# Altium PCB back_STM32F405.PcbDoc (part 2 of 2)
Units mil, origin at the board's own origin, x right, y up, seen from the top; angles counter-clockwise.
Board outline 3149.61 x 3937.01 mil, 4 copper layers (Top Layer, GND02, PWR03, Bottom Layer), stack 23.756 mil thick; 194 components, 149 nets, 1258 pads, 42 vias.
Unrouted connection lines stored in the file: 522.
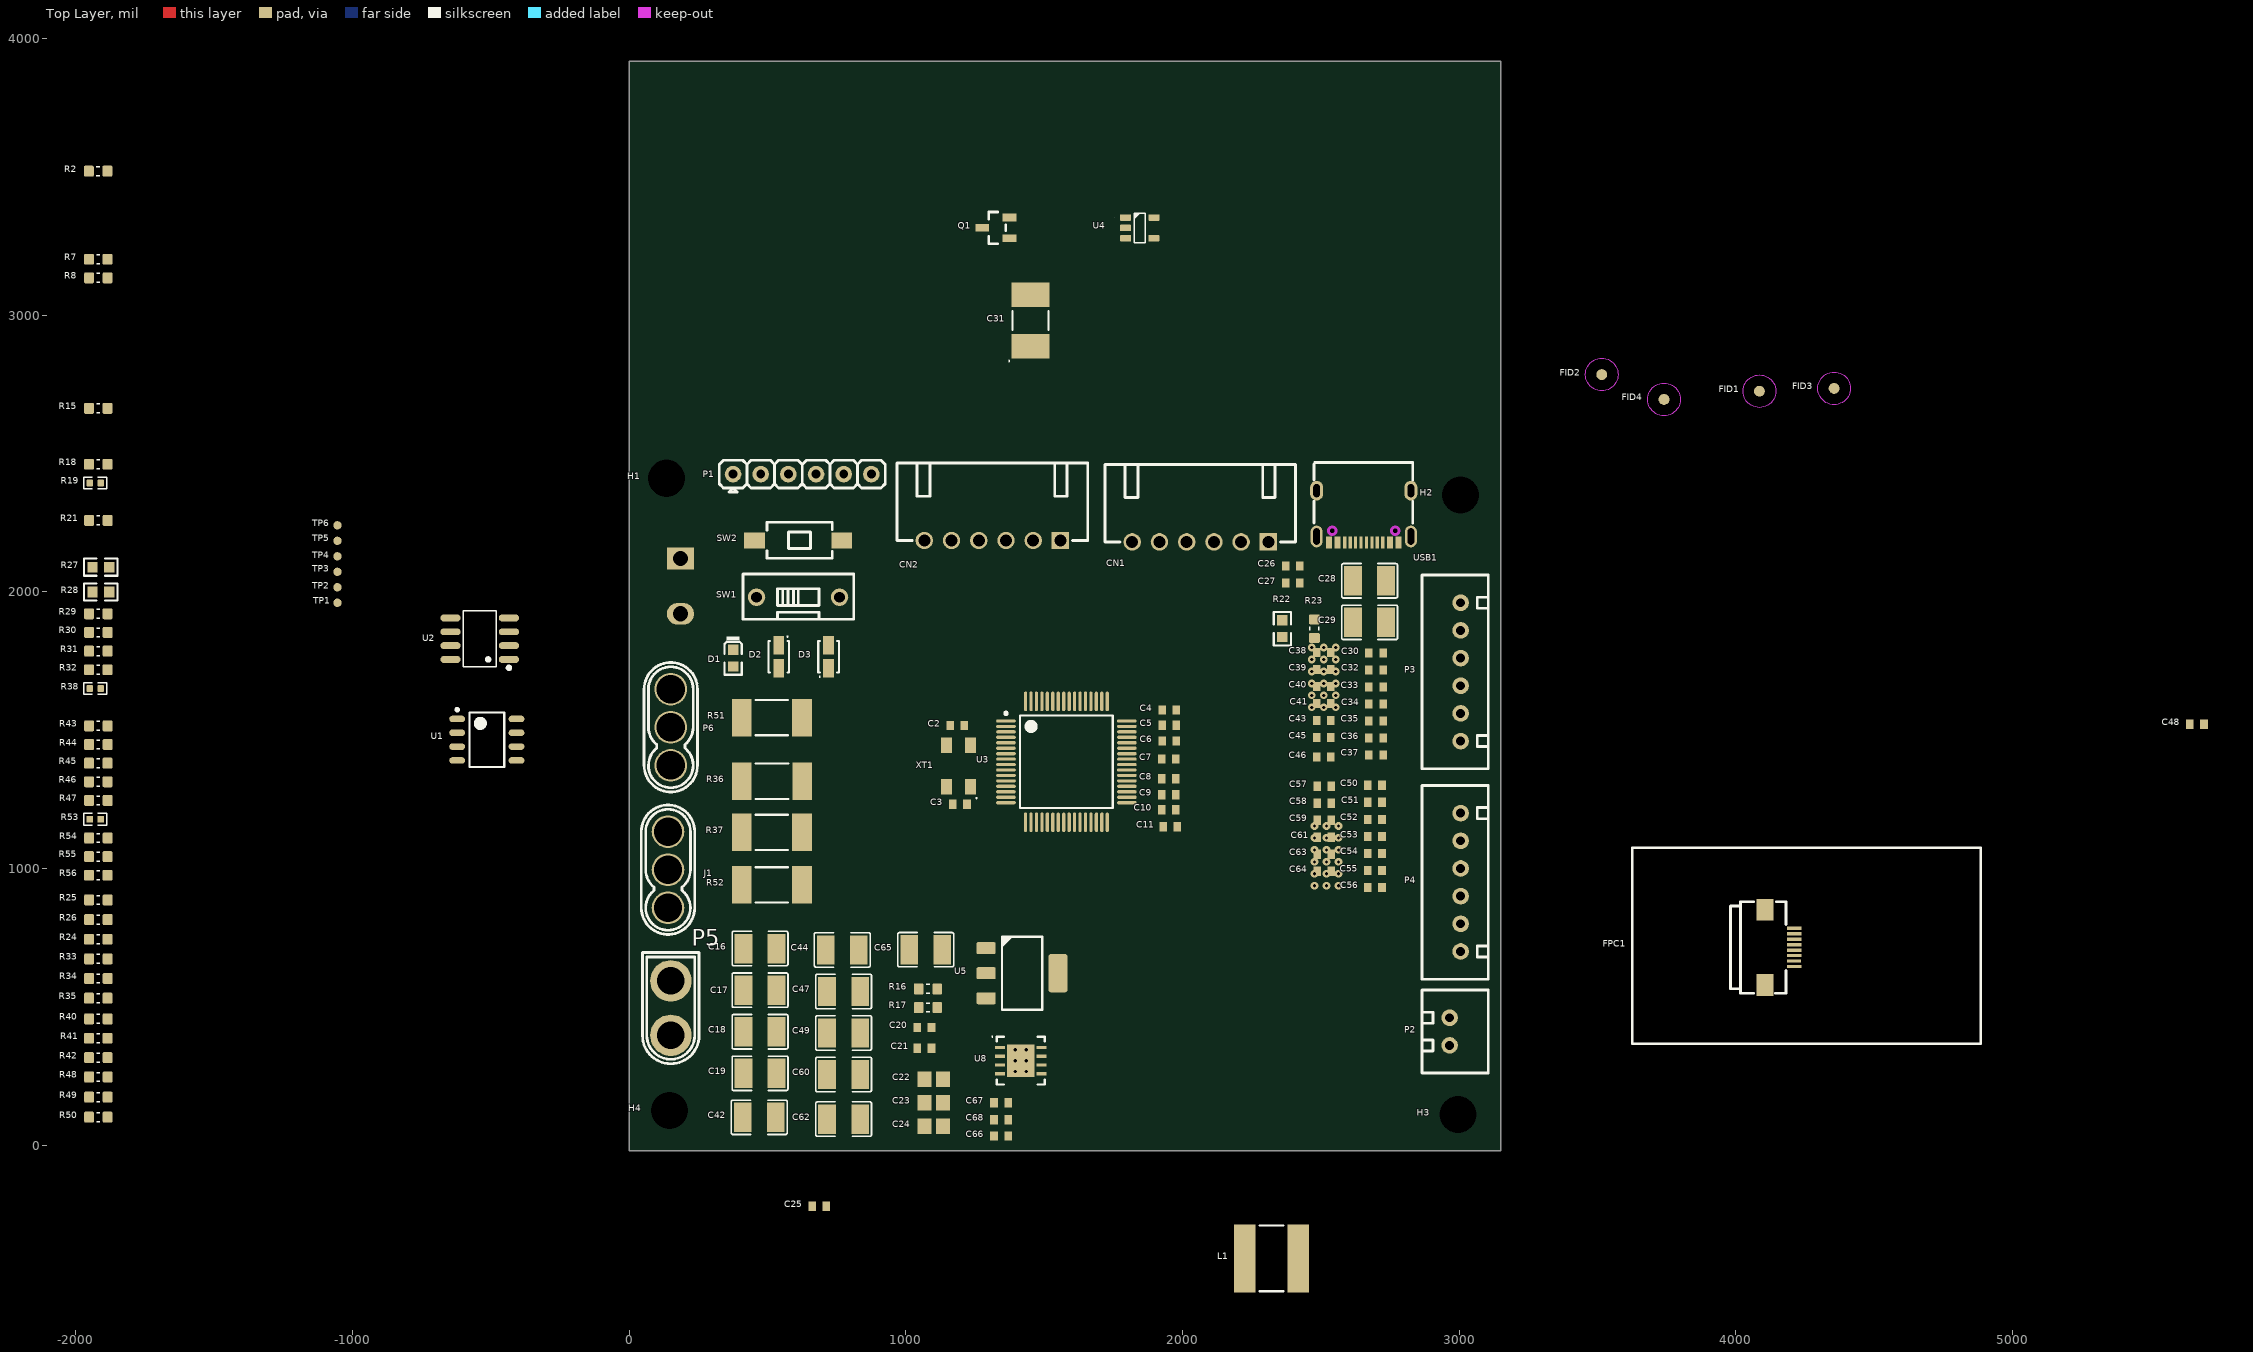
[diagram p0: Top Layer view]

## Part data (continued)
U3: "ARM Cortex-M4 32-bit MCU+FPU, 210 DMIPS, 1024 kB Flash, 192 kB Internal RAM, 51 I/Os, 64-pin LQFP, -40 to 85 degC, Tray", I/Os (High Current)=51, Manufacturer=STMicroelectronics, Operating Frequency(F) (Processor speed) (MHz)=168, Supplier Part Number 1=497-11767-ND, Supply Voltage(Vcc) max (V)=3.6, Supply Voltage(Vcc) min (V)=1.8, ComponentLink1Description="Manufacturer URL", ComponentLink1URL=http://www.st.com/web/en/home.html, ComponentLink2Description=Datasheet, ComponentLink2URL=http://www.st.com/st-web-ui/static/active/en/resource/technical/document/datasheet/DM00037051.pdf, ComponentLink3Description="Package Specification", ComponentLink3URL=http://www.st.com/st-web-ui/static/active/en/resource/technical/document/datasheet/DM00037051.pdf, Core="ARM Cortex-M4", D/A Converter=2x12-bit, DatasheetVersion="Rev. 4", FLASH Size (Prog) (kB)=1024, Internal RAM Size (kB)=192, Mounting Technology="Surface Mount", PackageDescription="64-Pin Low Profile Quad Flat Package, 10 x 10 mm Body, 0.5 mm Pitch", PackageReference=LQFP64, PackageVersion="Rev. 4, 06/2013", Packing=Tray, PartNumber=STM32F405RGT6, Supplier 1=Digi-Key, Supplier 2=Farnell, Supplier 3=Newark, Supplier 4=Mouser, Supplier Part Number 2=2064363, Supplier Part Number 3=73T2329, Supplier Part Number 4=511-STM32F405RGT6
U4: library part LP5907MFX-3.3/NOPB, "IC REG LDO 3.3V 0.25A SOT23-5", Current - Limit (Min)=-, Current - Output=250mA, Manufacturer="Texas Instruments", Operating Temperature="-40°C ~ 125°C", Package / Case="SC-74A, SOT-753", Supplier Device Package=SOT-23, Supplier Part Number 1=296-38557-1-ND, Voltage - Input="Up to 5.5V", Category="Integrated Circuits (ICs)", ComponentLink1Description=http://www.ti.com/lit/ds/symlink/lp5907.pdf, ComponentLink1URL=http://www.ti.com/lit/ds/symlink/lp5907.pdf, Mounting Type="Surface Mount", Packaging="Cut Tape (CT)", Part Status=Active, Pricing 1="1=0.57, 10=0.487, 100=0.3634, 500=0.28552, 1000=0.22063 (USD)", Regulator Topology="Positive Fixed", RoHS="RoHS Compliant", Stock 1=39845, Supplier 1=Digi-Key, Voltage - Dropout (Typical)=-, Voltage - Output=3.3V
U5: library part AZ1117EH-3.3TRG1, "IC REG LDO 3.3V 1A SOT223", Current - Limit (Min)=-, Current - Output=1A, Manufacturer="Diodes Incorporated", Operating Temperature="-40°C ~ 125°C", Package / Case="TO-261-4, TO-261AA", Supplier Device Package=SOT-223, Supplier Part Number 1=AZ1117EH-3.3TRG1DICT-ND, Voltage - Dropout (Typical)="1.1V @ 1A", Voltage - Input="Up to 13V", Category="Integrated Circuits (ICs)", ComponentLink1Description=http://www.diodes.com/assets/Datasheets/AZ1117E.pdf, ComponentLink1URL=http://www.diodes.com/assets/Datasheets/AZ1117E.pdf, Mounting Type="Surface Mount", Packaging="Cut Tape (CT)", Part Status=Active, Pricing 1="1=0.43, 10=0.321, 100=0.1815, 500=0.12022, 1000=0.09216 (USD)", Regulator Topology="Positive Fixed", RoHS="RoHS Compliant", Stock 1=22748, Supplier 1=Digi-Key, Voltage - Output=3.3V
U6 U7: "MOTOR DRIVER, 3PH, 56HTSSOP"
U8: "DRIVER, MOSFET, HALF BRIDGE, WSON-8, 1A", Supplier Part Number 1=2400642RL, Supplier 1=Farnell, Supplier 2=Farnell, Supplier 3=Farnell, Supplier Part Number 2=2400642, Supplier Part Number 3=2382850
U9: library part To-220-35W-3R-1%, "220封装2插电阻", JLCPCB Part Class="Extended Part", LCSC Part Name="3Ω ±1% 35W", Manufacturer=Milliohm(毫欧), Operating Temperature Range=-55℃~+150℃, Overload Voltage (Max)=350V, Power(Watts)=35W, Tolerance=±1%, Add into BOM=yes, Convert to PCB=yes, Datasheet=https://atta.szlcsc.com/upload/public/pdf/source/20221020/51BE5AE648F6C576EF2EAAB1AEBF3830.pdf, Device=To-220-35W-3R-1%, Manufacturer Part=To-220-35W-3R-1%, Name=3Ω, Supplier=LCSC, Supplier Footprint=TO-220-2, Supplier Part=C5209756, Symbol=TO-220-35W-3R-1%
USB1: Current Rating - Power (Max)=5A, JLCPCB Part Class="Extended Part", LCSC Part Name="Type-C 母 卧贴", Manufacturer="SHOU HAN(首韩)", Operating Temperature Range=-25℃~+85℃, Add into BOM=yes, Connector Type=Type-C, Convert to PCB=yes, Datasheet=https://atta.szlcsc.com/upload/public/pdf/source/20211123/39B17C16241EAC15C5E277BDA434118E.pdf, Device="TYPE-C 16PIN 2MD(073)", Gender=母, Manufacturer Part="TYPE-C 16PIN 2MD(073)", Mounting Style=卧贴, Name="TYPE-C 16PIN 2MD(073)", Number of Contacts=16P, Number of Ports=1, Standard=-, Supplier=LCSC, Supplier Footprint=SMD, Supplier Part=C2765186, Symbol="TYPE-C 16PIN 2MD(073)"
XT1: library part ABM3B-8.000MHZ-10-1-U-T, "Crystal 8MHz ±10ppm 10pF 200 Ohm -10°C ~ 60°C Surface Mount 4-SMD, No Lead (DFN, LCC)", Frequency Stability=±10ppm, Load Capacitance=10pF, Manufacturer="Abracon LLC", Operating Mode=Fundamental, Operating Temperature="-10°C ~ 60°C", Package / Case="4-SMD, No Lead", Ratings=-, Supplier Part Number 1=535-9721-1-ND, Category="Crystals, Oscillators, Resonators", ComponentLink1Description=http://www.abracon.com/Resonators/abm3b.pdf, ComponentLink1URL=http://www.abracon.com/Resonators/abm3b.pdf, Frequency Tolerance=±10ppm, Height - Seated (Max)="0.043\" (1.10mm)", Manufacturer Part Number=ABM3B-8.000MHZ-10-1-U-T, Mounting Type="Surface Mount", Packaging="Cut Tape (CT)", Part Status=Active, Pricing 1="1=0.69, 10=0.578, 50=0.5198, 100=0.462, 500=0.4389 (USD)", Pricing 2="1000=0.336, 3000=0.315, 5000=0.3045, 10000=0.294 (USD)", RoHS="RoHS Compliant", Size / Dimension="0.197\" L x 0.126\" W (5.00mm x 3.20mm)", Stock=35437, Supplier 1=Digi-Key, Supplier 2=Digi-Key, Supplier Part Number 2=535-9721-2-ND, Type="MHz Crystal"

## Via types
v1: diameter 27.56, hole 11.81, Top Layer to Bottom Layer, 42 vias

## Nets (pads, with @x,y where several pads share a name; then routed paths per layer and width w, separated by ;. In a path a pad name is that pad's centre, name@x,y a point inside that pad or via, vN(x,y) a via of type N, cw(c..) or ccw(c..) an arc to the next point about the centre after c; other vN are vias at no path point)
+5: C21.2 C31.1 L1.2 P1.1 P3.2 P4.2 R22.2 U4.1 U4.3 U5.3
AGND: C1.1 C2.2 C3.2 C4.1 C5.1 C6.1 C7.1 C8.1 C9.1 C10.1 C11.1 C12.2 C13.2 C14.2 C15.2 C16.2 C17.1 C18.1 C19.1 C20.1 C21.1 C22.1 C23.1 C24.1 C25.1 C26.2 C27.2 C28.1 C29.1 C31.2 C34.1 C35.1 C38.1 C39.2 C40.2 C41.1 C42.1 C43.1 C44.1 C45.1 C46.1 C47.1 C48.1 C49.1 C52.1 C53.1 C56.1 C57.2 C58.2 C59.1 C60.1 C61.1 C62.1 C63.1 C64.1 C65.1 C66.1 C68.1 CN1.6 CN2.6 D2.A FPC1.2 FPC1.9 FPC1.10 P1.4 P3.6 P4.6 P5.2 Q12.S Q13.S Q24.S Q25.S Q28.S Q29.S R7.1 R17.1 R18.1 R20.1 R21.2 R27.1 R28.2 R36.1 R37.1 R39.1 R43.2 R44.1 R51.1 R52.1 R55.1 SW1.2 SW2.2 TP2.1 U1.2 U2.3 U3.12 U3.18 U3.63 U4.2 U5.1 U6.28 U6.30 U6.32 U6.44 U6.57 U7.28 U7.30 U7.32 U7.44 U7.55 U7.57 U8.4 U8.9 U9.1 USB1.1 USB1.12 USB1.13 USB1.14 XT1.G
  other v1: 1395.31,265.63 1434.68,265.63 1395.31,305 1434.68,305 1395.31,344.37 1434.68,344.37 2476.69,936.73 2520,936.73 2563.31,936.73 2476.69,980.04 2520,980.04 2563.31,980.04 2476.69,1023.35 2520,1023.35 2563.31,1023.35 2476.69,1066.65 2520,1066.65 2563.31,1066.65 2476.69,1109.96 2520,1109.96 2563.31,1109.96 2476.69,1153.27 2520,1153.27 2563.31,1153.27 2466.69,1581.73 2510,1581.73 2553.31,1581.73 2466.69,1625.04 2510,1625.04 2553.31,1625.04 2466.69,1668.35 2510,1668.35 2553.31,1668.35 2466.69,1711.65 2510,1711.65 2553.31,1711.65 2466.69,1754.96 2510,1754.96 2553.31,1754.96 2466.69,1798.27 2510,1798.27 2553.31,1798.27
AUX_H_1: U3.30 U8.2
AUX_L_1: U3.29 U8.3
AUX_TEMP_1: C66.2 R53.1 R55.2 U3.21
AVCC: C24.2 R19.2 R38.2 R53.2 TP1.1 U4.4 U4.5 U6.24 U7.24
BOOT0_1: R15.1 SW1.1 U3.60
CAN_D_1: U1.1 U3.62
CAN_R_1: U1.4 U3.61
DCBUS: C12.1 C13.1 C14.1 C15.1 C16.1 C17.2 C18.2 C19.2 C28.2 C29.2 C42.2 C44.2 C47.2 C49.2 C60.2 C62.2 C65.2 P5.1 Q2.D Q3.D Q4.D Q5.D Q6.D Q7.D Q14.D Q15.D Q16.D Q17.D Q18.D Q19.D Q26.D Q27.D R16.2 U6.29 U6.53 U6.54 U7.29
EN_GATE_1: U3.33 U6.16 U7.16
FAULT_1: U3.54 U6.6 U7.6
GH_A_2: R24.2 U6.47
GH_A_3: R40.2 U7.47
GH_B_2: R25.2 U6.42
GH_B_3: R41.2 U7.42
GH_C_2: R26.2 U6.37
GH_C_3: R42.2 U7.37
GL_A_2: R35.2 U6.45
GL_A_3: R50.2 U7.45
GL_B_2: R34.2 U6.40
GL_B_3: R49.2 U7.40
GL_C_2: R33.2 U6.35
GL_C_3: R48.2 U7.35
GPIO0_1: SW2.1 U3.28
GVDD: C34.2 C35.2 C52.2 C53.2 U6.13 U7.13
LEDA_1: FPC1.1 R8.1
M0_AH_1: U3.41 U6.17
M0_AL_1: U3.34 U6.18
M0_BH_1: U3.42 U6.19
M0_BL_1: U3.35 U6.20
M0_CH_1: U3.43 U6.21
M0_CL_1: U3.36 U6.22
M0_ENC_A_1: P4.3 R9.1 U3.56
M0_ENC_B_1: P4.4 R10.1 U3.57
M0_ENC_Z_1: P4.5 R11.1 U3.40
M0_nCS_1: U3.2 U6.8
M0_SO1_1: C45.2 R31.2 TP3.1 U3.8
M0_SO2_1: C46.2 R32.2 TP4.1 U3.9
M0_TEMP_1: C25.2 C48.2 R19.1 R20.2 R38.1 R39.2
M0_TEMP（ENC_CS0）_1: CN1.5 U3.25
M1_AH_1: U3.37 U7.17
M1_AL_1: U3.23 U7.18
M1_BH_1: U3.38 U7.19
M1_BL_1: U3.26 U7.20
M1_CH_1: U3.39 U7.21
M1_CL_1: U3.27 U7.22
M1_ENC_A_1: P3.3 R12.1 U3.58
M1_ENC_B_1: P3.4 R13.1 U3.59
M1_ENC_Z_1: P3.5 R14.1 U3.4
M1_nCS_1: U3.3 U7.8
M1_SO1_1: C63.2 R46.2 TP5.1 U3.11
M1_SO2_1: C64.2 R47.2 TP6.1 U3.10
M1_TEMP（ENC_CS1）_1: CN2.5 U3.20
NetC1_2: C1.2 U2.8
NetC2_1: C2.1 U3.5 XT1.3
NetC3_1: C3.1 U3.6 XT1.1
NetC4_2: C4.2 U3.47
NetC5_2: C5.2 U3.31
NetC11_2: C11.2 U3.13
NetC26_1: C26.1 R23.1
NetC27_1: C27.1 R23.2 U6.2
NetC30_1: C30.1 D2.K L1.1 U6.50 U6.51
NetC30_2: C30.2 U6.52
NetC32_2: C32.2 U6.48
NetC33_2: C33.2 U6.43
NetC36_1: C36.1 U6.14
NetC36_2: C36.2 U6.15
NetC37_2: C37.2 U6.38
NetC38_2: C38.2 R29.2 U6.33
NetC39_1: C39.1 C40.1 U6.23
NetC41_2: C41.2 R30.2 U6.31
NetC43_2: C43.2 U6.27
NetC50_2: C50.2 U7.48
NetC51_2: C51.2 U7.43
NetC54_1: C54.1 U7.14
NetC54_2: C54.2 U7.15
NetC55_2: C55.2 U7.38
NetC56_2: C56.2 R44.2 U7.33
NetC57_1: C57.1 C58.1 U7.23
NetC59_2: C59.2 R45.2 U7.31
NetC61_2: C61.2 U7.27
NetC67_1: C67.1 Q26.S Q27.S Q28.D Q29.D U8.6 U9.2
NetC67_2: C67.2 D3.K U8.8
NetD1_K: D1.K R18.2
NetP1_3: P1.3 R1.1
NetP1_5: P1.5 R5.1
NetP2_1: P2.1 R4.2 U1.7
NetP2_2: P2.2 R4.1 U1.6
NetQ1_1: Q1.1 R2.1 R7.2
NetQ1_3: Q1.3 R8.2
NetQ2_G: Q2.G Q3.G R24.1
NetQ4_G: Q4.G Q5.G R25.1
NetQ6_G: Q6.G Q7.G R26.1
NetQ8_G: Q8.G Q9.G R33.1
NetQ10_G: Q10.G Q11.G R34.1
NetQ12_G: Q12.G Q13.G R35.1
NetQ14_G: Q14.G Q15.G R40.1
NetQ16_G: Q16.G Q17.G R41.1
NetQ18_G: Q18.G Q19.G R42.1
NetQ20_G: Q20.G Q21.G R48.1
NetQ22_G: Q22.G Q23.G R49.1
NetQ24_G: Q24.G Q25.G R50.1
NetQ26_G: Q26.G Q27.G R54.1
NetQ28_G: Q28.G Q29.G R56.1
NetR3_1: R3.1 USB1.5
NetR6_1: R6.1 USB1.8
NetR21_1: R21.1 U6.1
NetR22_1: R22.1 R27.2 U6.3
NetR28_1: R28.1 U6.7
NetR31_1: R31.1 U6.25
NetR32_1: R32.1 U6.26
NetR43_1: R43.1 U7.7
NetR46_1: R46.1 U7.25
NetR47_1: R47.1 U7.26
NetR54_2: R54.2 U8.7
NetR56_2: R56.2 U8.5
NetU2_1: U2.1 USB1.6
NetU2_2: U2.2 USB1.7
NetU6_12: U6.12
NetU7_12: U7.12
nRST_1: C6.2 P1.6 U3.7
OCTW_1: U6.5 U7.5
RXD_1: U2.7 U3.15
SH_A_2: C32.1 J1.1 Q2.S Q3.S Q12.D Q13.D U6.46
SH_A_3: C50.1 P6.1 Q14.S Q15.S Q24.D Q25.D U7.46
SH_B_2: C33.1 J1.2 Q4.S Q5.S Q10.D Q11.D U6.41
SH_B_3: C51.1 P6.2 Q16.S Q17.S Q22.D Q23.D U7.41
SH_C_2: C37.1 J1.3 Q6.S Q7.S Q8.D Q9.D U6.36
SH_C_3: C55.1 P6.3 Q18.S Q19.S Q20.D Q21.D U7.36
SL_B_2: Q10.S Q11.S R29.1 R37.2 U6.39
SL_B_3: Q22.S Q23.S R52.2 U7.39
SL_C_2: Q8.S Q9.S R30.1 R36.2 U6.34
SL_C_3: Q20.S Q21.S R45.1 R51.2 U7.34
SPI_MISO_1: CN1.3 CN2.3 U3.52 U6.9 U7.9
SPI_MOSI_1: CN1.2 CN2.2 U3.53 U6.10 U7.10
SPI_SCK_1: CN1.4 CN2.4 U3.51 U6.11 U7.11
SRC_CS_1: FPC1.8 U3.55
SRC_RES_1: FPC1.3 U3.24
SRC_RS_1: FPC1.4 U3.50
SRC_SCL_1: FPC1.6 U3.17
SRC_SDA_1: FPC1.5 U3.16
SWCLK_1: R1.2 U3.49
SWDIO_1: R5.2 U3.46
TXD_1: U2.6 U3.14
USB_DM_1: R6.2 U3.44
USB_DP_1: R3.2 U3.45
VBUS_S_1: C20.2 R16.1 R17.2 U3.22
VCC: C7.2 C8.2 C9.2 C10.2 C22.2 C23.2 C68.2 CN1.1 CN2.1 D1.A D3.A FPC1.7 P1.2 P3.1 P4.1 Q1.2 R2.2 R9.2 R10.2 R11.2 R12.2 R13.2 R14.2 R15.2 U1.3 U2.5 U3.1 U3.19 U3.32 U3.48 U3.64 U5.2 U5.4 U6.49 U7.49 U8.1
pads on no net: FID1.0 FID2.0 FID3.0 FID4.0 H1.1 H2.1 H3.1 H4.1 Q2.7 Q2.9 Q2.10 Q2.11 Q3.7 Q3.9 Q3.10 Q3.11 Q4.7 Q4.9 Q4.10 Q4.11 Q5.7 Q5.9 Q5.10 Q5.11 Q6.7 Q6.9 Q6.10 Q6.11 Q7.7 Q7.9 Q7.10 Q7.11 Q8.7 Q8.9 Q8.10 Q8.11 Q9.7 Q9.9 Q9.10 Q9.11 Q10.7 Q10.9 Q10.10 Q10.11 Q11.7 Q11.9 Q11.10 Q11.11 Q12.7 Q12.9 Q12.10 Q12.11 Q13.7 Q13.9 Q13.10 Q13.11 Q14.7 Q14.9 Q14.10 Q14.11 Q15.7 Q15.9 Q15.10 Q15.11 Q16.7 Q16.9 Q16.10 Q16.11 Q17.7 Q17.9 Q17.10 Q17.11 Q18.7 Q18.9 Q18.10 Q18.11 Q19.7 Q19.9 Q19.10 Q19.11 Q20.7 Q20.9 Q20.10 Q20.11 Q21.7 Q21.9 Q21.10 Q21.11 Q22.7 Q22.9 Q22.10 Q22.11 Q23.7 Q23.9 Q23.10 Q23.11 Q24.7 Q24.9 Q24.10 Q24.11 Q25.7 Q25.9 Q25.10 Q25.11 Q26.7 Q26.9 Q26.10 Q26.11 Q27.7 Q27.9 Q27.10 Q27.11 Q28.7 Q28.9 Q28.10 Q28.11 Q29.7 Q29.9 Q29.10 Q29.11 R1.0 R2.0 R3.0 R4.0 R5.0 R6.0 R7.0 R8.0 R9.0 R10.0 R11.0 R12.0 R13.0 R14.0 R15.0 R16.0 R17.0 R18.0 R19.0 R20.0 R21.0 R23.0 R24.0 R25.0 R26.0 R29.0 R30.0 R31.0 R32.0 R33.0 R34.0 R35.0 R38.0 R39.0 R40.0 R41.0 R42.0 R43.0 R44.0 R45.0 R46.0 R47.0 R48.0 R49.0 R50.0 R53.0 R54.0 R55.0 R56.0 U1.5 U1.8 U2.4 U4.0 U5.0 U6.4 U6.55 U6.56 U7.1 U7.2 U7.3 U7.4 U7.50 U7.51 U7.52 U7.53 U7.54 U7.56 USB1.2 USB1.3 USB1.4 USB1.9 USB1.10 USB1.11

## Polygon pours and split planes (outlines as drawn)
AGND on GND02 (split plane): 3129.51,-0.19 20.1,-0.19 20.1,3896.62 3129.51,3896.62
DCBUS on PWR03 (split plane): 3129.51,-0.19 20.1,-0.19 20.1,3896.62 3129.51,3896.62

## Silkscreen, mask and mechanical layers (free items; w line width, h text height)
Drill Guide:
  the board outline again, w10

## Text inside footprints (layer, text, board x,y; h text height)
SW1: Mechanical 6 "1" at 711.1,1973 h13.07 r90